# EAGLE board breadBUG_v1_panelized (EAGLE 6.1)
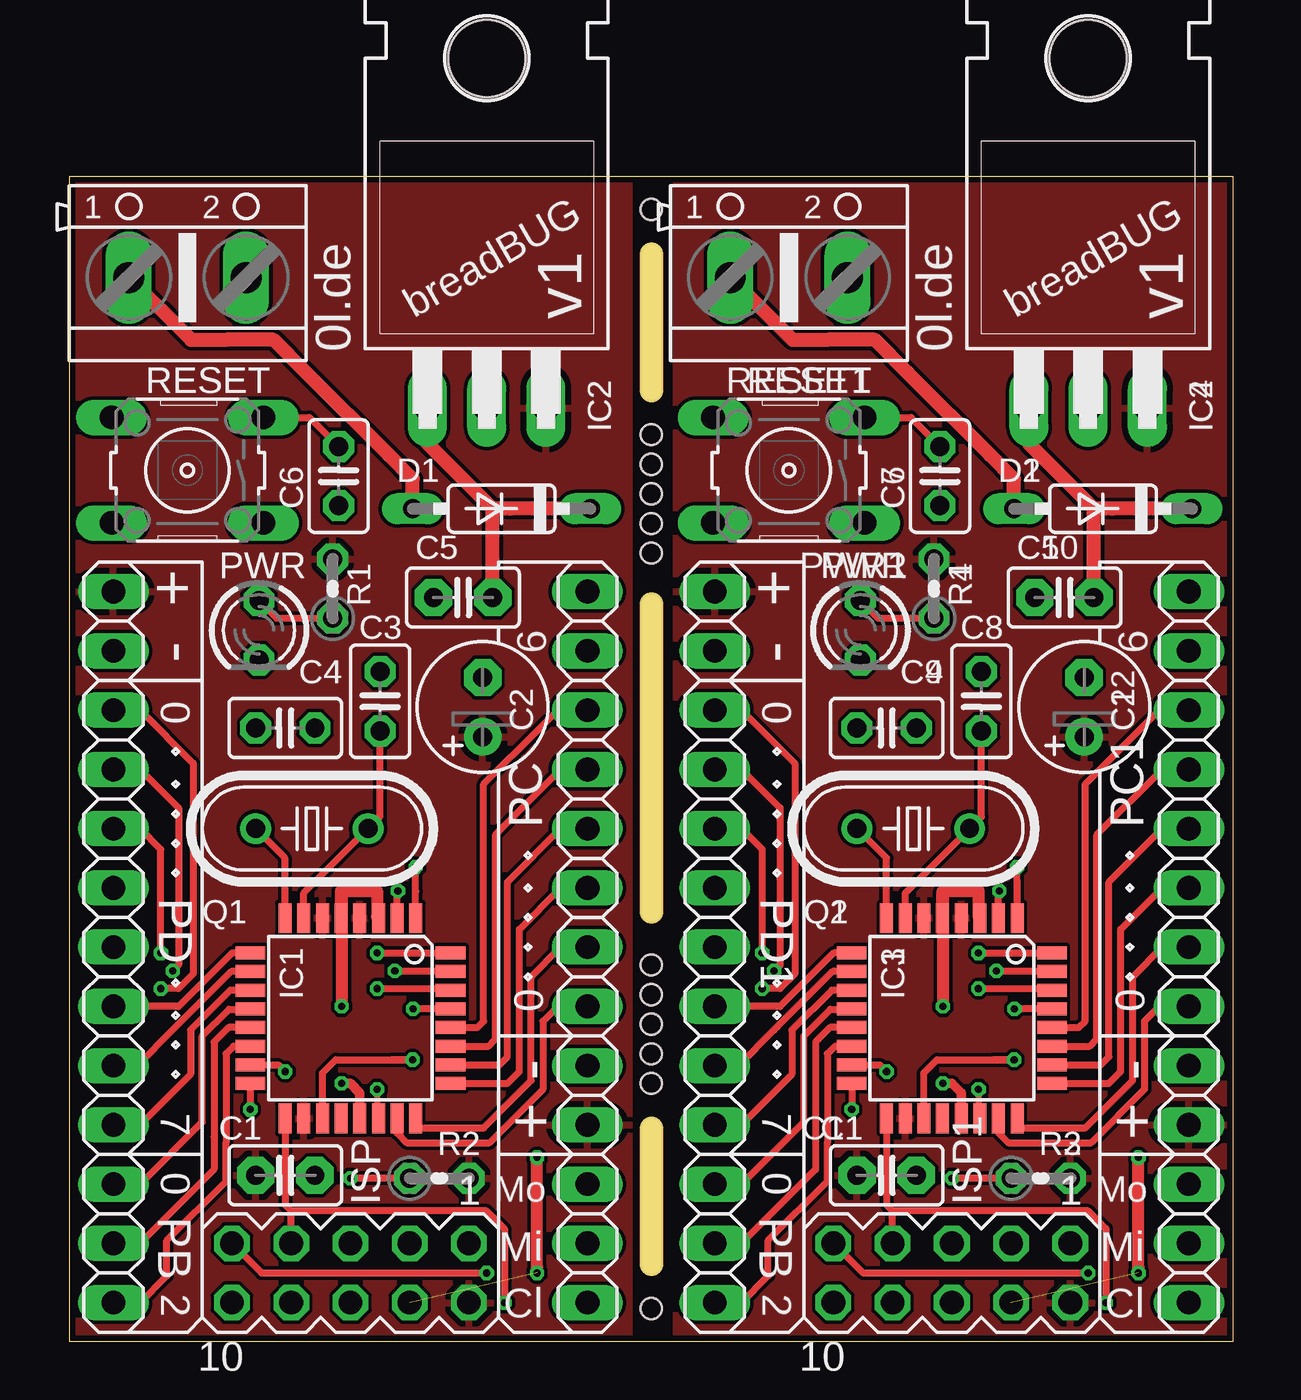
[diagram p0: board, top side]
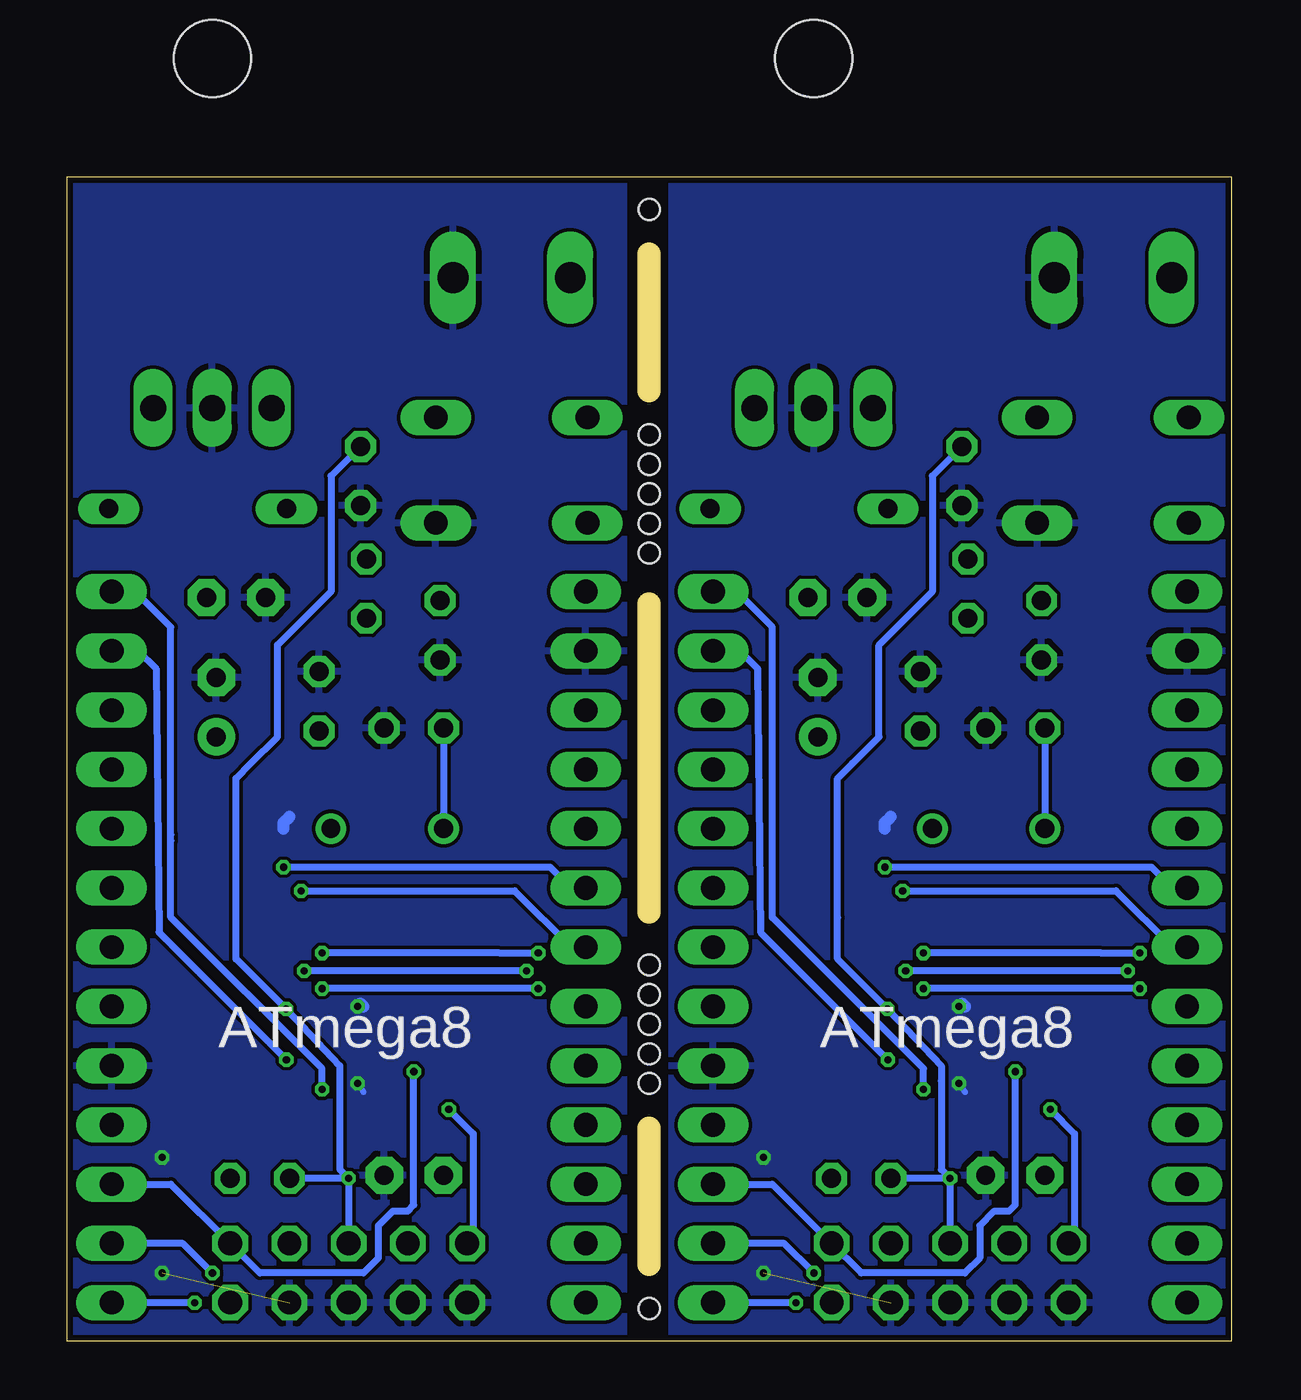
[diagram p1: board, bottom side, seen from below]

Size 49.91 x 49.91 mm. Coordinates in mm from the lower left corner, seen from the top.
Outline: 0,0 49.91,0 49.91,49.91 0,49.91 0,0
Copper layers (1*16): Top 0.035mm / dielectric 1.5mm / Bottom 0.035mm
Design rules: minimum track width 6mil, minimum drill 12mil, track to track 6mil, track to pad 6mil, pad to pad 6mil, via to via 6mil, smd to smd 0mil, copper to edge 10mil, drill to drill 10mil, minimum pad ring 10mil, minimum via ring 6mil, stop-mask expansion 2mil, vias tented up to drill 100mil, thermal gap 10mil
Holes 0.9 mm at 24.96,16.13 24.96,14.86 24.96,13.59 24.96,12.32 24.96,11.05 24.95,38.86 24.95,37.59 24.95,36.32 24.95,35.05 24.95,33.78 24.96,1.4 24.95,48.51
Milling: 3 lines

## Footprints (pad centres in the part's own frame; a part is rotated, then mirrored left to right if it is on the bottom)
C2.5-2 = drill 0.813 pad 1.6 octagon: 1 -1.27,0; 2 1.27,0
E2,5-6 = drill 0.813 pad 1.6: + -1.27,0 | drill 0.813 pad 1.6 octagon: - 1.27,0
C025-025X050 = drill 0.813 octagon: 1 -1.27,0; 2 1.27,0
DO35-7 = drill 0.813 long: A 3.81,0; C -3.81,0
TQFP32-08 = smd 1.27 x 0.559: 1 -4.293,2.8; 2 -4.293,2; 3 -4.293,1.2; 4 -4.293,0.4; 5 -4.293,-0.4; 6 -4.293,-1.2; 7 -4.293,-2; 8 -4.293,-2.8; 17 4.293,-2.8; 18 4.293,-2; 19 4.293,-1.2; 20 4.293,-0.4; 21 4.293,0.4; 22 4.293,1.2; 23 4.293,2; 24 4.293,2.8 | smd 0.559 x 1.27: 9 -2.8,-4.293; 10 -2,-4.293; 11 -1.2,-4.293; 12 -0.4,-4.293; 13 0.4,-4.293; 14 1.2,-4.293; 15 2,-4.293; 16 2.8,-4.293; 25 2.8,4.293; 26 2,4.293; 27 1.2,4.293; 28 0.4,4.293; 29 -0.4,4.293; 30 -1.2,4.293; 31 -2,4.293; 32 -2.8,4.293
TO220H = drill 1.118 long: 1 -2.54,-10.16; 2 0,-10.16; 3 2.54,-10.16 | hole 3.302: 0,4.826
MA05-2 = drill 1.016 octagon: 1 -5.08,-1.27; 2 -5.08,1.27; 3 -2.54,-1.27; 4 -2.54,1.27; 5 0,-1.27; 6 0,1.27; 7 2.54,-1.27; 8 2.54,1.27; 9 5.08,-1.27; 10 5.08,1.27
1X03 = drill 1.016 long: 1 -2.54,0; 2 0,0; 3 2.54,0
1X10 = drill 1.016 long: 1 -11.43,0; 2 -8.89,0; 3 -6.35,0; 4 -3.81,0; 5 -1.27,0; 6 1.27,0; 7 3.81,0; 8 6.35,0; 9 8.89,0; 10 11.43,0
LED3MM = drill 0.813 octagon: A -1.27,0; K 1.27,0
HC49U-V = drill 0.813: 1 -2.413,0; 2 2.413,0
0204V = drill 0.813 octagon: 1 -1.27,0; 2 1.27,0
B3F-10XX = drill 1.016 long: 1 -3.251,2.261; 2 3.251,2.261; 3 -3.251,-2.261; 4 3.251,-2.261
AK500/2 = drill 1.321 long: 1 -2.515,0; 2 2.515,0

## Placement (x,y rotation side)
C1  100nF  [C2.5-2]  9.27,7.11 180 top
C2  [E2,5-6]  17.74,27.18 90 top
C3  [C025-025X050]  13.34,27.43 270 top
C4  [C025-025X050]  9.27,26.29 180 top
C5  100nF  [C2.5-2]  16.89,31.88 0 top
C6  47n  [C025-025X050]  11.56,37.08 90 top
C7  47n  [C025-025X050]  37.34,37.08 90 top
C8  [C025-025X050]  39.12,27.43 270 top
C9  [C025-025X050]  35.05,26.29 180 top
C10  100nF  [C2.5-2]  42.67,31.88 0 top
C11  100nF  [C2.5-2]  35.05,7.11 180 top
C12  [E2,5-6]  43.52,27.18 90 top
D1  1N4148DO35-7  [DO35-7]  18.54,35.69 180 top
D2  1N4148DO35-7  [DO35-7]  44.32,35.69 180 top
IC1  MEGA8-AI  [TQFP32-08]  12.06,13.84 270 top
IC2  7805T  [TO220H]  17.91,50.16 0 top
IC3  MEGA8-AI  [TQFP32-08]  37.85,13.84 270 top
IC4  7805T  [TO220H]  43.69,50.16 0 top
ISP  [MA05-2]  12.06,2.92 180 top
ISP1  [MA05-2]  37.85,2.92 180 top
PB  [1X03]  22.23,4.19 270 top
PB1  [1X03]  48.01,4.19 270 top
PC  [1X10]  22.23,20.7 90 top
PC1  [1X10]  48.01,20.7 90 top
PD  [1X10]  1.91,20.7 270 top
PD1  [1X10]  27.69,20.7 270 top
PORT_B0  [1X03]  1.91,4.19 270 top
PORT_B1  [1X03]  27.69,4.19 270 top
PWR  [LED3MM]  8.14,30.47 270 top
PWR1  [LED3MM]  33.92,30.47 270 top
Q1  16 MHz  [HC49U-V]  10.41,21.97 0 top
Q2  16 MHz  [HC49U-V]  36.2,21.97 0 top
R1  200  [0204V]  11.3,32.26 90 top
R2  10k  [0204V]  15.88,6.99 0 top
R3  10k  [0204V]  41.66,6.99 0 top
R4  200  [0204V]  37.08,32.26 90 top
RESET  [B3F-10XX]  5.08,37.34 180 top
RESET1  [B3F-10XX]  30.86,37.34 180 top
X1  [AK500/2]  5.08,45.59 0 top
X2  [AK500/2]  30.86,45.59 0 top

## Library data of the parts
C1 C5 C10 C11 = capacitor-wima
C2-C4 C6-C9 C12 R1-R4 = rcl
D1 D2 = diode
IC1 IC3 = atmel; MPN: ATMEGA8-16AU; OC_FARNELL: 9171371; OC_NEWARK: 73M8863
IC2 IC4 = linear
ISP ISP1 = con-lstb; OC_FARNELL: unknown; OC_NEWARK: unknown
PB PB1 PC PC1 PD PD1 PORT_B0 PORT_B1 = pinhead
PWR PWR1 = led
Q1 Q2 = crystal; OC_FARNELL: 1666969; OC_NEWARK: unknown
RESET RESET1 = switch-omron; MPN: B3F-1000; OC_FARNELL: 176432; OC_NEWARK: 36M3542
X1 X2 = con-ptr500; OC_FARNELL: unknown; OC_NEWARK: unknown

## Nets
GND: C1.1 C2.- C3.1 C4.1 C5.1 C6.1 IC1.3 IC1.5 IC1.21 IC2.2 ISP.4 ISP.6 ISP.8 ISP.10 PC.2 PD.2 PWR.K RESET.1 X1.2
GND1: C7.1 C8.1 C9.1 C10.1 C11.1 C12.- IC3.3 IC3.5 IC3.21 IC4.2 ISP1.4 ISP1.6 ISP1.8 ISP1.10 PC1.2 PD1.2 PWR1.K RESET1.1 X2.2
N$1: PWR1.A R4.1
N$2: C3.2 IC1.7 Q1.2
N$3: C4.2 IC1.8 Q1.1
N$4: PWR.A R1.1
N$5: C10.2 D2.C IC4.1
N$6: D2.A X2.1
N$7: C5.2 D1.C IC2.1
N$8: D1.A X1.1
N$9: C9.2 IC3.8 Q2.1
N$10: C8.2 IC3.7 Q2.2
PB0: IC1.12 PORT_B0.1
PB1: IC1.13 PORT_B0.2
PB2: IC1.14 PORT_B0.3
PB3: IC1.15 ISP.1 PB.1
PB4: IC1.16 ISP.9 PB.2
PB5: IC1.17 ISP.7 PB.3
PB6: IC3.16 ISP1.9 PB1.2
PB7: IC3.17 ISP1.7 PB1.3
PB8: IC3.12 PORT_B1.1
PB9: IC3.13 PORT_B1.2
PB10: IC3.14 PORT_B1.3
PB11: IC3.15 ISP1.1 PB1.1
PC0: IC1.23 PC.3
PC1: IC1.24 PC.4
PC2: IC1.25 PC.5
PC3: IC1.26 PC.6
PC4: IC1.27 PC.7
PC5: IC1.28 PC.8
PC6: IC1.19 PC.9
PC7: IC1.22 PC.10
PC8: IC3.23 PC1.3
PC9: IC3.24 PC1.4
PC10: IC3.25 PC1.5
PC11: IC3.26 PC1.6
PC12: IC3.27 PC1.7
PC13: IC3.28 PC1.8
PC14: IC3.19 PC1.9
PC15: IC3.22 PC1.10
PD0: IC1.30 PD.3
PD1: IC1.31 PD.4
PD2: IC1.32 PD.5
PD3: IC1.1 PD.6
PD4: IC1.2 PD.7
PD5: IC1.9 PD.8
PD6: IC1.10 PD.9
PD7: IC1.11 PD.10
PD8: IC3.11 PD1.10
PD9: IC3.10 PD1.9
PD10: IC3.9 PD1.8
PD11: IC3.2 PD1.7
PD12: IC3.1 PD1.6
PD13: IC3.32 PD1.5
PD14: IC3.31 PD1.4
PD15: IC3.30 PD1.3
RESET: C6.2 IC1.29 ISP.5 R2.1 RESET.3
RESET1: C7.2 IC3.29 ISP1.5 R3.1 RESET1.3
VCC: C1.2 C2.+ IC1.4 IC1.6 IC1.18 IC2.3 ISP.2 PC.1 PD.1 R1.2 R2.2
VCC1: C11.2 C12.+ IC3.4 IC3.6 IC3.18 IC4.3 ISP1.2 PC1.1 PD1.1 R3.2 R4.2

## Tracks (layer width: path | path; a pad name or v marks a point on that pad's centre or on a via)
GND  (via drill 0.3)  (1 unrouted)
  Top 0.406: IC1.21 12.46,10.65 12.06,11.05 v11.68,11.05
  Top 0.508: v20.07,2.92 20.07,3.17 v20.07,7.87 | IC1.5 11.66,19.29 11.68,19.3 | 11.68,19.3 13.21,19.3 | 13.21,19.3 13.21,18.19 IC1.3 | 13.21,19.3 11.68,19.3 | 11.68,19.3 v11.68,14.35
  Bottom 0.254: v11.68,11.05 11.43,10.67
  Bottom 0.508: 14.86,21.97 14.86,22.23 14.61,22.48 | v11.68,14.35 11.56,14.48 11.43,14.35
  pour Bottom: 0,0 0,49.91 24,49.91 24,0
GND1  (via drill 0.3)  (1 unrouted)
  Top 0.406: IC3.21 38.25,10.65 37.85,11.05 v37.47,11.05
  Top 0.508: v45.85,2.92 45.85,3.17 v45.85,7.87 | IC3.5 37.45,19.29 37.47,19.3 | 37.47,19.3 38.99,19.3 | 38.99,19.3 38.99,18.19 IC3.3 | 38.99,19.3 37.47,19.3 | 37.47,19.3 v37.47,14.35
  Bottom 0.254: v37.47,11.05 37.21,10.67
  Bottom 0.508: 40.64,21.97 40.64,22.23 40.39,22.48 | v37.47,14.35 37.34,14.48 37.21,14.35
  pour Bottom: 26.04,0 26.04,49.91 49.91,49.91 49.91,0
N$1
  Top 0.305: PWR1.A 34.68,30.99 R4.1
N$2
  Top 0.305: IC1.7 10.06,19.21 Q1.2 13.34,22.48 C3.2
N$3
  Top 0.305: IC1.8 9.27,20.71 Q1.1
  Bottom 0.305: C4.2 8,22.61 Q1.1
N$4
  Top 0.305: PWR.A 8.9,30.99 R1.1
N$5
  Top 0.61: C10.2 43.94,35.69 | 43.94,35.69 41.15,38.48 IC4.1 | D2.C 44.7,35.69 43.94,35.69
N$6
  Top 0.61: D2.A 40.51,36.96 39.5,37.97 35.94,41.53 34.54,42.93 32.51,42.93 31.01,42.93 X2.1
N$7
  Top 0.61: C5.2 18.16,35.69 | 18.16,35.69 15.37,38.48 IC2.1 | D1.C 18.92,35.69 18.16,35.69
N$8
  Top 0.61: D1.A 14.73,36.96 13.72,37.97 10.16,41.53 8.76,42.93 6.73,42.93 5.23,42.93 X1.1
N$9
  Top 0.305: IC3.8 35.05,20.71 Q2.1
  Bottom 0.305: C9.2 33.78,22.61 Q2.1
N$10
  Top 0.305: IC3.7 35.85,19.21 Q2.2 39.12,22.48 C8.2
PB0
  Top 0.305: PORT_B0.1 3.05,6.73 5.71,9.4 5.71,13.08 6.86,14.22 7.75,14.22 IC1.12
PB1
  Top 0.305: IC1.13 6.84,13.44 6.35,12.95 6.22,12.83 6.22,8.76 6.22,7.37 3.05,4.19 PORT_B0.2
PB2
  Top 0.305: PORT_B0.3 3.05,1.65 4.19,2.79 4.19,4.32 6.73,6.86 6.73,8.51 6.73,12.32 7.05,12.64 IC1.14
PB3  (via drill 0.3)
  Top 0.305: IC1.15 8.98,11.84 v9.27,11.56
  Bottom 0.305: v9.27,11.56 9.27,5.84 9.53,5.59 10.16,5.59 10.79,4.95 10.79,3.56 11.43,2.92 15.88,2.92 ISP.1 19.68,6.73 PB.1
PB4  (via drill 0.3)
  Top 0.305: ISP.9 8.26,2.92 v17.91,2.92 | IC1.16 v7.77,9.93
  Bottom 0.305: v17.91,2.92 19.18,4.19 PB.2 | v7.77,9.93 6.73,8.89 6.73,4.45 ISP.9
PB5  (via drill 0.3)
  Top 0.305: IC1.17 9.27,5.85 9.53,5.59 | ISP.7 9.53,5.59 | v18.67,1.65 18.67,4.83 17.91,5.59 9.53,5.59
  Bottom 0.305: v18.67,1.65 PB.3
PB6  (via drill 0.3)
  Top 0.305: ISP1.9 34.04,2.92 v43.69,2.92 | IC3.16 v33.55,9.93
  Bottom 0.305: v43.69,2.92 44.96,4.19 PB1.2 | v33.55,9.93 32.51,8.89 32.51,4.45 ISP1.9
PB7  (via drill 0.3)
  Top 0.305: IC3.17 35.05,5.85 35.31,5.59 | ISP1.7 35.31,5.59 | v44.45,1.65 44.45,4.83 43.69,5.59 35.31,5.59
  Bottom 0.305: v44.45,1.65 PB1.3
PB8
  Top 0.305: PORT_B1.1 28.83,6.73 31.5,9.4 31.5,13.08 32.64,14.22 33.53,14.22 IC3.12
PB9
  Top 0.305: IC3.13 32.62,13.44 32.13,12.95 32,12.83 32,8.76 32,7.37 28.83,4.19 PORT_B1.2
PB10
  Top 0.305: PORT_B1.3 28.83,1.65 29.97,2.79 29.97,4.32 32.51,6.86 32.51,8.51 32.51,12.32 32.84,12.64 IC3.14
PB11  (via drill 0.3)
  Top 0.305: IC3.15 34.77,11.84 v35.05,11.56
  Bottom 0.305: v35.05,11.56 35.05,5.84 35.31,5.59 35.94,5.59 36.58,4.95 36.58,3.56 37.21,2.92 41.66,2.92 ISP1.1 45.47,6.73 PB1.1
PC0
  Top 0.305: PC.3 20.95,14.35 20.32,13.72 20.32,10.79 18.03,8.51 14.48,8.51 14.06,8.92 IC1.23
PC1
  Top 0.305: IC1.24 14.96,9.55 14.83,9.17 14.86,9.14 17.78,9.14 19.81,11.18 19.81,15.62 21.08,16.89 PC.4
PC2
  Top 0.305: IC1.25 18.79,11.04 19.3,11.56 19.3,17.65 21.08,19.43 PC.5
PC3
  Top 0.305: IC1.26 18.45,11.84 18.8,12.19 18.8,19.68 21.08,21.97 PC.6
PC4
  Top 0.305: IC1.27 17.98,12.64 18.29,12.95 18.29,21.72 21.08,24.51 PC.7
PC5
  Top 0.305: IC1.28 17.51,13.44 17.78,13.72 17.78,23.88 20.19,26.29 20.95,27.05 PC.8
PC6  (via drill 0.3)
  Top 0.305: IC1.19 10.87,11.5 11.43,12.06 13.84,12.06 | 13.84,12.06 v14.73,12.06 13.84,12.06
  Bottom 0.305: PC.9 21.08,29.59 20.32,28.83 20.19,17.53 v14.73,12.06
PC7  (via drill 0.3)
  Top 0.254: v13.21,10.79 13.21,9.61 IC1.22
  Bottom 0.305: PC.10 21.21,32.13 21.08,32 19.68,30.61 19.68,21.72 19.68,21.46 19.68,18.16 13.21,11.68 v13.21,10.79
PC8
  Top 0.305: PC1.3 46.74,14.35 46.1,13.72 46.1,10.79 43.81,8.51 40.26,8.51 39.85,8.92 IC3.23
PC9
  Top 0.305: IC3.24 40.74,9.55 40.62,9.17 40.64,9.14 43.56,9.14 45.59,11.18 45.59,15.62 46.86,16.89 PC1.4
PC10
  Top 0.305: IC3.25 44.57,11.04 45.09,11.56 45.09,17.65 46.86,19.43 PC1.5
PC11
  Top 0.305: IC3.26 44.23,11.84 44.58,12.19 44.58,19.68 46.86,21.97 PC1.6
PC12
  Top 0.305: IC3.27 43.76,12.64 44.07,12.95 44.07,21.72 46.86,24.51 PC1.7
PC13
  Top 0.305: IC3.28 43.29,13.44 43.56,13.72 43.56,23.88 45.97,26.29 46.74,27.05 PC1.8
PC14  (via drill 0.3)
  Top 0.305: IC3.19 36.65,11.5 37.21,12.06 39.62,12.06 | 39.62,12.06 v40.51,12.06 39.62,12.06
  Bottom 0.305: PC1.9 46.86,29.59 46.1,28.83 45.97,17.53 v40.51,12.06
PC15  (via drill 0.3)
  Top 0.254: v38.99,10.79 38.99,9.61 IC3.22
  Bottom 0.305: PC1.10 46.99,32.13 46.86,32 45.47,30.61 45.47,21.72 45.47,21.46 45.47,18.16 38.99,11.68 v38.99,10.79
PD0  (via drill 0.3)
  Top 0.305: PD.3 3.05,27.05 5.33,24.77 5.33,15.75 4.7,15.11 v3.94,15.11 | v13.21,15.11 16.29,15.11 IC1.30
  Bottom 0.305: v3.94,15.11 v13.21,15.11
PD1  (via drill 0.3)
  Top 0.305: PD.4 3.05,24.51 4.7,22.86 4.7,16.13 v4.45,15.88 | v13.97,15.88 16.33,15.88 IC1.31
  Bottom 0.305: v4.45,15.88 v13.97,15.88
PD2  (via drill 0.3)
  Top 0.305: PD.5 3.05,21.97 3.94,21.08 v3.94,16.64 | v13.21,16.64 IC1.32
  Bottom 0.305: v13.21,16.64 5.59,16.64 v3.94,16.64
PD3  (via drill 0.3)
  Top 0.305: IC1.1 14.87,19.3 v14.86,20.32
  Bottom 0.305: v14.86,20.32 12.57,20.32 3.43,20.32 2.54,19.43 PD.6
PD4  (via drill 0.3)
  Top 0.305: IC1.2 14.06,19.08 v14.1,19.3
  Bottom 0.305: v14.1,19.3 4.95,19.3 2.54,16.89 PD.7
PD5
  Top 0.305: IC1.9 6.99,16.64 4.7,14.35 PD.8
PD6
  Top 0.305: IC1.10 6.95,15.84 4.57,13.46 4.45,13.34 2.92,11.81 PD.9
PD7
  Top 0.305: IC1.11 6.92,15.04 5.21,13.34 5.21,11.43 3.05,9.27 PD.10
PD8
  Top 0.305: IC3.11 32.7,15.04 30.99,13.34 30.99,11.43 28.83,9.27 PD1.10
PD9
  Top 0.305: IC3.10 32.73,15.84 30.35,13.46 30.23,13.34 28.7,11.81 PD1.9
PD10
  Top 0.305: IC3.9 32.77,16.64 30.48,14.35 PD1.8
PD11  (via drill 0.3)
  Top 0.305: IC3.2 39.85,19.08 v39.88,19.3
  Bottom 0.305: v39.88,19.3 30.73,19.3 28.32,16.89 PD1.7
PD12  (via drill 0.3)
  Top 0.305: IC3.1 40.65,19.3 v40.64,20.32
  Bottom 0.305: v40.64,20.32 38.35,20.32 29.21,20.32 28.32,19.43 PD1.6
PD13  (via drill 0.3)
  Top 0.305: PD1.5 28.83,21.97 29.72,21.08 v29.72,16.64 | v38.99,16.64 IC3.32
  Bottom 0.305: v38.99,16.64 31.37,16.64 v29.72,16.64
PD14  (via drill 0.3)
  Top 0.305: PD1.4 28.83,24.51 30.48,22.86 30.48,16.13 v30.23,15.88 | v39.75,15.88 42.11,15.88 IC3.31
  Bottom 0.305: v30.23,15.88 v39.75,15.88
PD15  (via drill 0.3)
  Top 0.305: PD1.3 28.83,27.05 31.11,24.77 31.11,15.75 30.48,15.11 v29.72,15.11 | v38.99,15.11 42.07,15.11 IC3.30
  Bottom 0.305: v29.72,15.11 v38.99,15.11
RESET  (via drill 0.3)
  Top 0.305: RESET.3 10.31,39.6 C6.2 | R2.1 v12.06,6.99 | 16.38,14.22 IC1.29 v14.75,14.24
  Bottom 0.305: v12.06,6.99 12.45,7.37 12.45,11.18 12.45,11.81 14.73,14.22 v14.75,14.24 16.89,16.38 16.89,18.16 16.89,24.13 16.26,24.77 15.11,25.91 15.11,29.84 12.83,32.13 12.83,37.08 C6.2 | v12.06,6.99 R2.1 | v12.06,6.99 12.06,4.7 ISP.5
RESET1  (via drill 0.3)
  Top 0.305: RESET1.3 36.09,39.6 C7.2 | R3.1 v37.85,6.99 | 42.16,14.22 IC3.29 v40.53,14.24
  Bottom 0.305: v37.85,6.99 38.23,7.37 38.23,11.18 38.23,11.81 40.51,14.22 v40.53,14.24 42.67,16.38 42.67,18.16 42.67,24.13 42.04,24.77 40.89,25.91 40.89,29.84 38.61,32.13 38.61,37.08 C7.2 | v37.85,6.99 R3.1 | v37.85,6.99 37.85,4.7 ISP1.5
VCC
  pour Top: 0,0 0,49.91 24,49.91 24,0
VCC1
  pour Top: 26.04,0 26.04,49.91 49.91,49.91 49.91,0

## Text on the board
tPlace: breadBUG | breadBUG | v1 | v1 | 0l.de | 0l.de | + | + | 6 | 6 | - | - | 0 | 0 | 0 | 0 | - | - | 7 | 7 | + | + | 0 | Mo | 0 | Mo | PB | Mi | PB | Mi | 2 | Cl | 2 | Cl
bPlace: ATmega8 | ATmega8
_tNames: RESET | RESET | IC2 | IC2 | D1 | D1 | C6 | C6 | PWR | C5 | PWR | C5 | R1 | R1 | C3 | C3 | C4 | C4 | C2 | C2 | PC | PC | PD | PD | Q1 | Q1 | IC1 | IC1 | C1 | C1 | R2 | R2 | ISP | ISP